# Allegro board PMOD2BNC_V1_0.brd
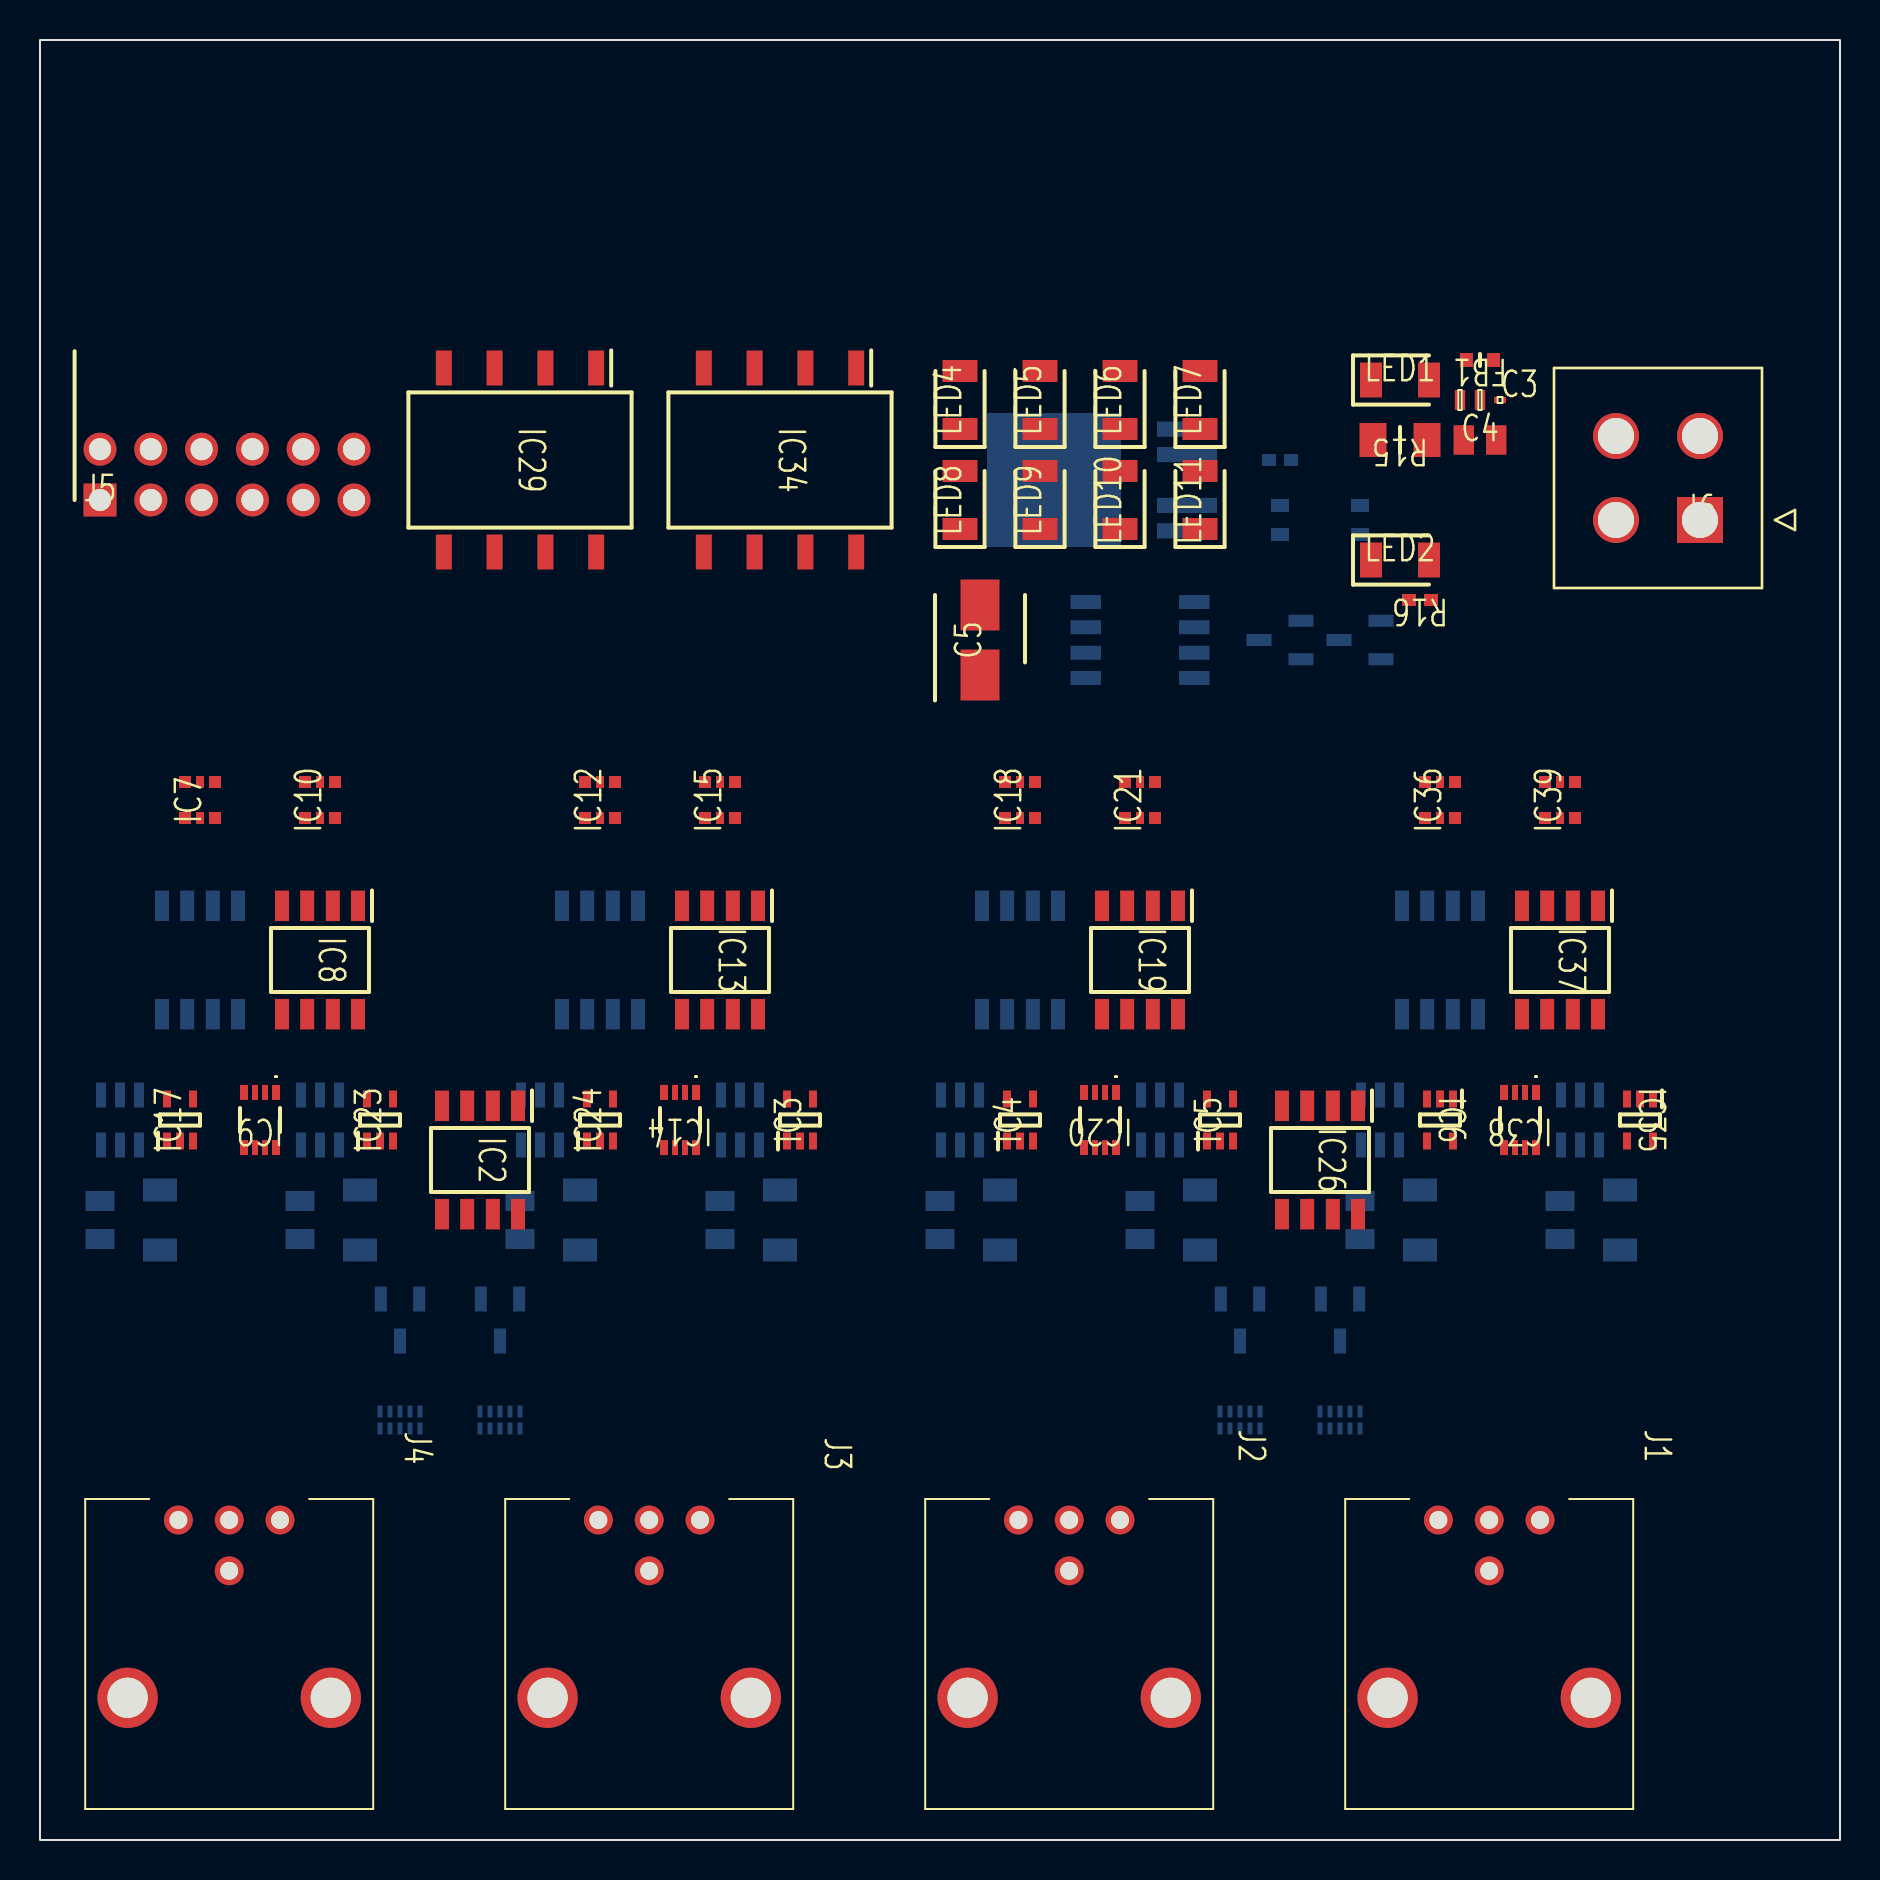
[diagram p0: board, top side]
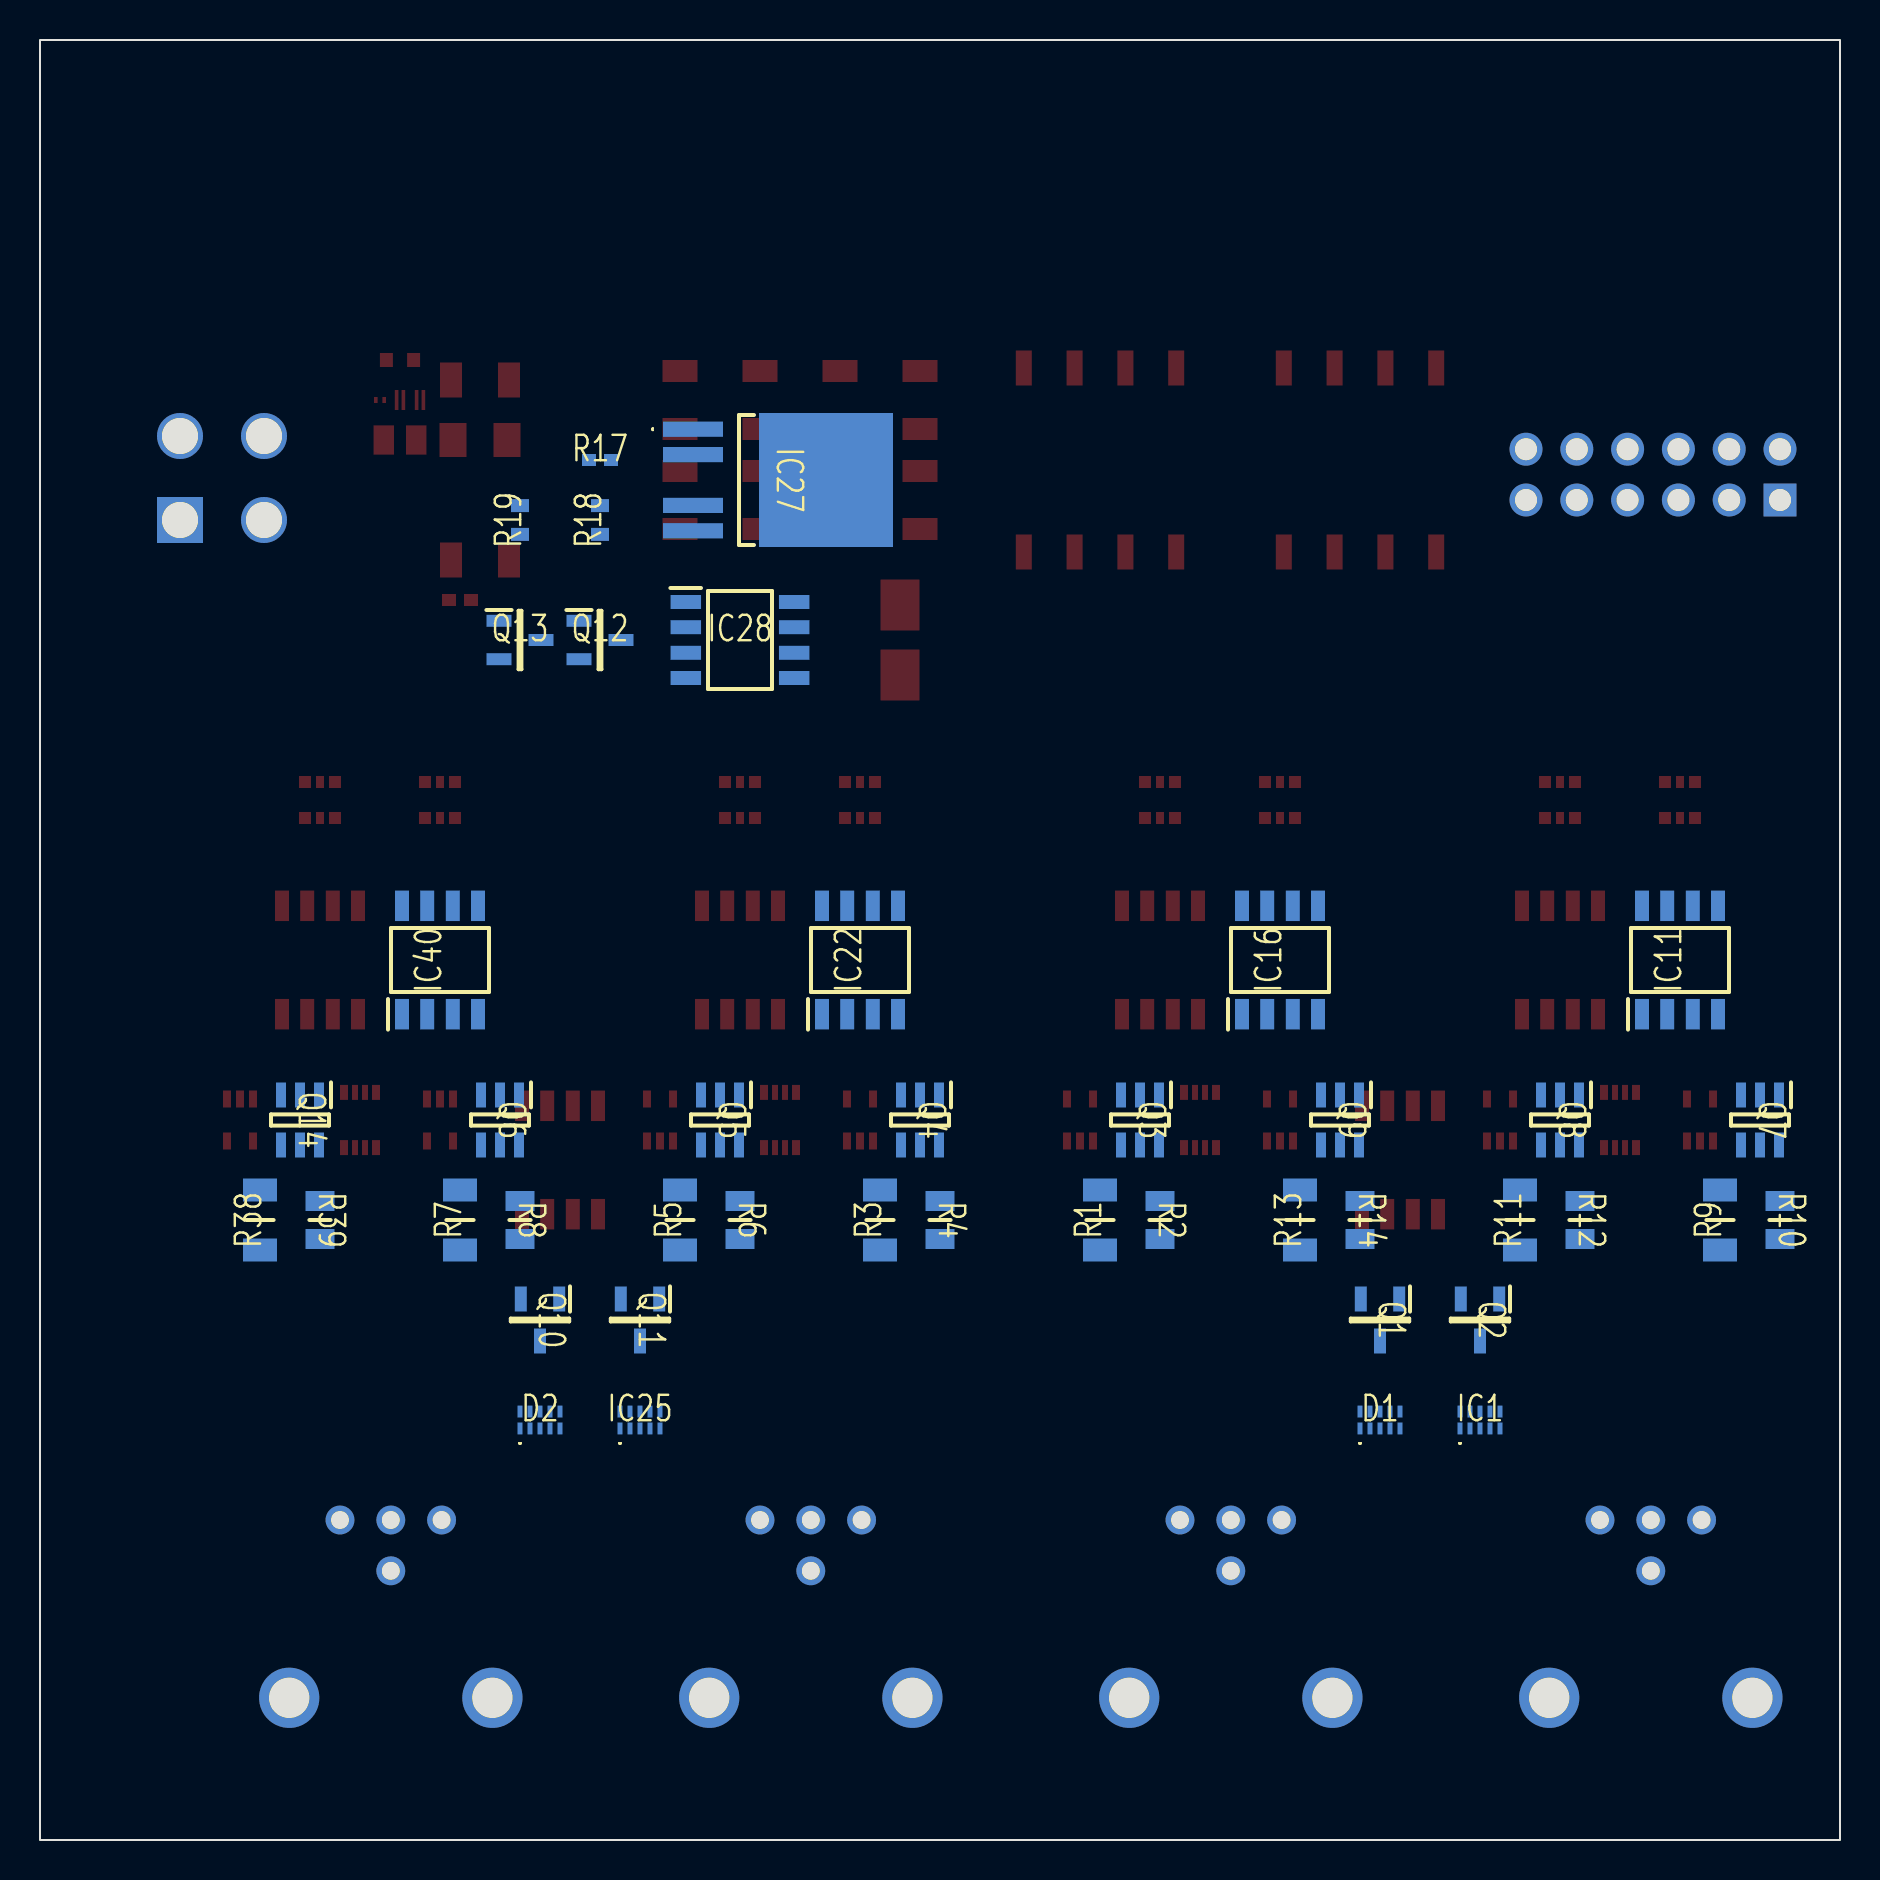
[diagram p1: board, bottom side, seen from below]

Outline 90 x 90 mm; copper layers: TOP, GND, VCC, BOTTOM. Coordinates in mm from the lower left corner of the outline.
Outline path: rectangle 0,0 90,90

## Placement (name value [footprint] x y rotation side)
C1  MSRLJ103SB5104MFNA01_100n  [MSRLJ103SB5104MFNA01_100N]  71 72 0 top
C2  MAASL063SB7103MFCA01  [100NCAP]  72 72 0 top
C3  KAM03CT70J105KH_1u  [KAM03CT70J105KH_1U]  73 72 0 top
C4  08053D334KAT2A  [CAPC2012X140N]  72 70 0 top
C5  MAL215375109E3  [CAPAE450X450N]  47 60 90 top
D1  PESD4USB3B_TBSX  [PESD4USB3BTBSX]  23 21 180 bottom
D2  PESD4USB3B_TBSX  [PESD4USB3BTBSX]  65 21 180 bottom
FB1  BLM18PG121SN1D  [BLM18EG121SH1D]  72 74 180 top
IC1  PESD4USB5B_TBRX  [PESD4USB5BTBRX]  18 21 180 bottom
IC2  FDS8958B  [SOIC127P600X175-8N]  22 34 270 top
IC3  NLVHC1G14DFT1G  [SOT65P210X110-5N]  38 36 90 top
IC4  NLVHC1G14DFT1G  [SOT65P210X110-5N]  49 36 90 top
IC5  NLVHC1G14DFT1G  [SOT65P210X110-5N]  59 36 90 top
IC6  NLVHC1G14DFT1G  [SOT65P210X110-5N]  70 36 270 top
IC7  74LVC1G3157GW_125  [74LVC1G3157GW125]  8 52 90 top
IC8  SI8620BC_B_IS  [SOIC127P600X175-8N]  14 44 270 top
IC9  74LVCH2T45DC_Q100H  [74LVCH2T45DCQ100H]  11 36 180 top
IC10  74LVC1G3157GW_125  [74LVC1G3157GW125]  14 52 90 top
IC11  SI8620BC_B_IS  [SOIC127P600X175-8N]  8 44 90 bottom
IC12  74LVC1G3157GW_125  [74LVC1G3157GW125]  28 52 90 top
IC13  SI8620BC_B_IS  [SOIC127P600X175-8N]  34 44 270 top
IC14  74LVCH2T45DC_Q100H  [74LVCH2T45DCQ100H]  32 36 180 top
IC15  74LVC1G3157GW_125  [74LVC1G3157GW125]  34 52 90 top
IC16  SI8620BC_B_IS  [SOIC127P600X175-8N]  28 44 90 bottom
IC17  NLVHC1G14DFT1G  [SOT65P210X110-5N]  7 36 90 top
IC18  74LVC1G3157GW_125  [74LVC1G3157GW125]  49 52 90 top
IC19  SI8620BC_B_IS  [SOIC127P600X175-8N]  55 44 270 top
IC20  74LVCH2T45DC_Q100H  [74LVCH2T45DCQ100H]  53 36 180 top
IC21  74LVC1G3157GW_125  [74LVC1G3157GW125]  55 52 90 top
IC22  SI8620BC_B_IS  [SOIC127P600X175-8N]  49 44 90 bottom
IC23  NLVHC1G14DFT1G  [SOT65P210X110-5N]  17 36 90 top
IC24  NLVHC1G14DFT1G  [SOT65P210X110-5N]  28 36 90 top
IC25  PESD4USB5B_TBRX  [PESD4USB5BTBRX]  60 21 180 bottom
IC26  FDS8958B  [SOIC127P600X175-8N]  64 34 270 top
IC27  -  [LD29150PTR]  52 68 270 bottom
IC28  FDS8958B  [SOIC127P600X175-8N]  55 60 180 bottom
IC29  DS04_254_2_04BK_SMT  [SOP254P990X430-8N]  24 69 270 top
IC34  DS04_254_2_04BK_SMT  [SOP254P990X430-8N]  37 69 270 top
IC35  NLVHC1G14DFT1G  [SOT65P210X110-5N]  80 36 270 top
IC36  74LVC1G3157GW_125  [74LVC1G3157GW125]  70 52 90 top
IC37  SI8620BC_B_IS  [SOIC127P600X175-8N]  76 44 270 top
IC38  74LVCH2T45DC_Q100H  [74LVCH2T45DCQ100H]  74 36 180 top
IC39  74LVC1G3157GW_125  [74LVC1G3157GW125]  76 52 90 top
IC40  SI8620BC_B_IS  [SOIC127P600X175-8N]  70 44 90 bottom
J1  031_6576  [0316576]  75 16 270 top
J2  031_6576  [0316576]  54 16 270 top
J3  031_6576  [0316576]  33 16 270 top
J4  031_6576  [0316576]  12 16 270 top
J5  71764_0114  [717640112]  3 67 0 top
J6  46207_1104  [46207-YY_2_04]  83 66 0 top
LED1  5988260107F  [LEDC3216X78N]  68 73 0 top
LED2  5988260107F  [LEDC3216X78N]  68 64 0 top
LED4  5988260107F  [LEDC3216X78N]  46 72 90 top
LED5  5988260107F  [LEDC3216X78N]  50 72 90 top
LED6  5988260107F  [LEDC3216X78N]  54 72 90 top
LED7  5988260107F  [LEDC3216X78N]  58 72 90 top
LED8  5988260107F  [LEDC3216X78N]  46 67 90 top
LED9  5988260107F  [LEDC3216X78N]  50 67 90 top
LED10  5988260107F  [LEDC3216X78N]  54 67 90 top
LED11  5988260107F  [LEDC3216X78N]  58 67 90 top
Q1  NVR4501NT1G  [SOT96P237X111-3N]  23 26 270 bottom
Q2  NVR4501NT1G  [SOT96P237X111-3N]  18 26 270 bottom
Q3  NTGD4167CT1G  [SOT95P275X110-6N]  35 36 270 bottom
Q4  NTGD4167CT1G  [SOT95P275X110-6N]  46 36 270 bottom
Q5  NTGD4167CT1G  [SOT95P275X110-6N]  56 36 270 bottom
Q6  NTGD4167CT1G  [SOT95P275X110-6N]  67 36 270 bottom
Q7  NTGD4167CT1G  [SOT95P275X110-6N]  4 36 270 bottom
Q8  NTGD4167CT1G  [SOT95P275X110-6N]  14 36 270 bottom
Q9  NTGD4167CT1G  [SOT95P275X110-6N]  25 36 270 bottom
Q10  NVR4501NT1G  [SOT96P237X111-3N]  65 26 270 bottom
Q11  NVR4501NT1G  [SOT96P237X111-3N]  60 26 270 bottom
Q12  NVR4501NT1G  [SOT96P237X111-3N]  62 60 180 bottom
Q13  NVR4501NT1G  [SOT96P237X111-3N]  66 60 180 bottom
Q14  NTGD4167CT1G  [SOT95P275X110-6N]  77 36 270 bottom
R1  ERA_8AEB1580V  [RESC3216X70N]  37 31 90 bottom
R2  RP73PF2A73R2BTDF  [RESC2012X65N]  34 31 270 bottom
R3  ERA_8AEB1580V  [RESC3216X70N]  48 31 90 bottom
R4  RP73PF2A73R2BTDF  [RESC2012X65N]  45 31 270 bottom
R5  ERA_8AEB1580V  [RESC3216X70N]  58 31 90 bottom
R6  RP73PF2A73R2BTDF  [RESC2012X65N]  55 31 270 bottom
R7  ERA_8AEB1580V  [RESC3216X70N]  69 31 90 bottom
R8  RP73PF2A73R2BTDF  [RESC2012X65N]  66 31 270 bottom
R9  ERA_8AEB1580V  [RESC3216X70N]  6 31 90 bottom
R10  RP73PF2A73R2BTDF  [RESC2012X65N]  3 31 270 bottom
R11  ERA_8AEB1580V  [RESC3216X70N]  16 31 90 bottom
R12  RP73PF2A73R2BTDF  [RESC2012X65N]  13 31 270 bottom
R13  ERA_8AEB1580V  [RESC3216X70N]  27 31 90 bottom
R14  RP73PF2A73R2BTDF  [RESC2012X65N]  24 31 270 bottom
R15  RNCP1206FTD10K0  [RESC3115X60N]  68 70 180 top
R16  TNPU04021K00BZEP00  [RESC1005X40N]  69 62 180 top
R17  TNPU04021K00BZEP00  [RESC1005X40N]  62 69 180 bottom
R18  ERA_3VEB5900V  [ERA3KV__0603_]  62 66 90 bottom
R19  ERA_3VEB3240V  [ERA3KV__0603_]  66 66 90 bottom
R38  ERA_8AEB1580V  [RESC3216X70N]  79 31 90 bottom
R39  RP73PF2A73R2BTDF  [RESC2012X65N]  76 31 270 bottom

## Library data of the parts
C1 = MSRLJ103SB5104MFNA01_100n
C2 = 100nCAP
C3 = KAM03CT70J105KH_1u
C4 = 08053D334KAT2A
C5 = MAL215375109E3
D1 D2 = PESD4USB3B_TBSX
FB1 = BLM18PG121SN1D
IC1 IC25 = PESD4USB5B_TBRX
IC2 IC26 IC28 = FDS8958B
IC3-IC6 IC17 IC23 IC24 IC35 = NLVHC1G14DFT1G
IC7 IC10 IC12 IC15 IC18 IC21 IC36 IC39 = 74LVC1G3157GW_125
IC8 IC11 IC13 IC16 IC19 IC22 IC37 IC40 = SI8620BC_B_IS
IC9 IC14 IC20 IC38 = 74LVCH2T45DC_Q100H
IC27 = LD29150PTR
IC29 IC34 = DS04_254_2_04BK_SMT
J1-J4 = 031_6576
J5 = 71764_0114
J6 = 46207_1104
LED1 LED2 LED4-LED11 = 5988260107F
Q1 Q2 Q10-Q13 = NVR4501NT1G
Q3-Q9 Q14 = NTGD4167CT1G
R1 R3 R5 R7 R9 R11 R13 R38 = ERA_8AEB1580V
R2 R4 R6 R8 R10 R12 R14 R39 = RP73PF2A73R2BTDF
R15 = RNCP1206FTD10K0
R16 R17 = TNPU04021K00BZEP00
R18 = ERA_3VEB5900V
R19 = ERA_3VEB3240V

## Footprints (pads in the part's own frame, mm; a bottom-side part is the same pattern mirrored in y, then rotated)
74LVC1G3157GW125
  rect 0.6x0.6 smd: 1(-0.9,0.75) 3(-0.9,-0.75) 4(0.9,-0.75) 6(0.9,0.75)
  rect 0.6x0.4 smd: 2(-0.9,0) 5(0.9,0)
74LVCH2T45DCQ100H
  rect 0.4x0.75 smd: 1(-0.8,-1.38) 4(0.8,-1.38) 5(0.8,1.38) 8(-0.8,1.38)
  rect 0.3x0.75 smd: 2(-0.25,-1.38) 3(0.25,-1.38) 6(0.25,1.38) 7(-0.25,1.38)
100NCAP
  rect 0.18x1 smd: 1(-0.17,0) 2(0.17,0)
46207-YY_2_04
  rect 2.3x2.3 hole 1.8: 1(0,0)
  round 2.3 hole 1.8: 2(-4.2,0) 3(0,4.2) 4(-4.2,4.2)
0316576
  round 1.446 hole 0.89: 1(0,0) 2(0,-2.54) 3(0,-5.08) 4(2.54,-2.54)
  round 3.015 hole 2.01: MH1(8.89,-7.62) MH2(8.89,2.54)
717640112
  rect 1.65x1.65 hole 1.1: 1(0,0)
  round 1.65 hole 1.1: 2(0,2.54) 3(2.54,0) 4(2.54,2.54) 5(5.08,0) 6(5.08,2.54) 7(7.62,0) 8(7.62,2.54) 9(10.16,0) 10(10.16,2.54) 11(12.7,0) 12(12.7,2.54)
BLM18EG121SH1D
  rect 0.65x0.7 smd: 1(-0.68,0) 2(0.68,0)
CAPAE450X450N
  rect 2.55x1.95 smd: 1(-1.75,0) 2(1.75,0)
CAPC2012X140N
  rect 1.02x1.47 smd: 1(-0.81,0) 2(0.81,0)
ERA3KV__0603_
  rect 0.65x0.9 smd: 1(-0.72,0) 2(0.72,0)
KAM03CT70J105KH_1U
  rect 0.18x0.3 smd: 1(-0.21,0) 2(0.21,0)
LD29150PTR
  rect 0.76x3 smd: 1(-2.54,-5.35) 2(-1.27,-5.35) 3(1.27,-5.35) 4(2.54,-5.35)
  rect 6.7x6.7 smd: 5(0,1.3)
LEDC3216X78N
  rect 1.1x1.75 smd: 1(-1.45,0) 2(1.45,0)
MSRLJ103SB5104MFNA01_100N
  rect 0.18x1 smd: 1(-0.17,0) 2(0.17,0)
PESD4USB3BTBSX
  rect 0.25x0.6 smd: 1(-1,-0.42) 2(-0.5,-0.42) 3(0,-0.42) 4(0.5,-0.42) 5(1,-0.42) 6(1,0.42) 7(0.5,0.42) 8(0,0.42) 9(-0.5,0.42) 10(-1,0.42)
PESD4USB5BTBRX
  rect 0.25x0.6 smd: 1(-1,-0.42) 2(-0.5,-0.42) 3(0,-0.42) 4(0.5,-0.42) 5(1,-0.42) 6(1,0.42) 7(0.5,0.42) 8(0,0.42) 9(-0.5,0.42) 10(-1,0.42)
RESC1005X40N
  rect 0.7x0.6 smd: 1(-0.55,0) 2(0.55,0)
RESC2012X65N
  rect 1x1.45 smd: 1(-0.95,0) 2(0.95,0)
RESC3115X60N
  rect 1.35x1.7 smd: 1(-1.35,0) 2(1.35,0)
RESC3216X70N
  rect 1.15x1.7 smd: 1(-1.5,0) 2(1.5,0)
SOIC127P600X175-8N
  rect 1.525x0.7 smd: 1(-2.71,1.9) 2(-2.71,0.64) 3(-2.71,-0.64) 4(-2.71,-1.9) 5(2.71,-1.9) 6(2.71,-0.64) 7(2.71,0.64) 8(2.71,1.9)
SOP254P990X430-8N
  rect 1.75x0.8 smd: 1(-4.6,3.81) 2(-4.6,1.27) 3(-4.6,-1.27) 4(-4.6,-3.81) 5(4.6,-3.81) 6(4.6,-1.27) 7(4.6,1.27) 8(4.6,3.81)
SOT65P210X110-5N
  rect 0.85x0.4 smd: 1(-1.05,0.65) 2(-1.05,0) 3(-1.05,-0.65) 4(1.05,-0.65) 5(1.05,0.65)
SOT95P275X110-6N
  rect 1.25x0.5 smd: 1(-1.25,0.95) 2(-1.25,0) 3(-1.25,-0.95) 4(1.25,-0.95) 5(1.25,0) 6(1.25,0.95)
SOT96P237X111-3N
  rect 1.25x0.6 smd: 1(-1.05,0.96) 2(-1.05,-0.96) 3(1.05,0)

## Nets
3V3_FPGA: IC7.5(VCC) IC8.1(VDD1) IC10.5(VCC) IC11.8(VDD2) IC12.5(VCC) IC13.1(VDD1) IC15.5(VCC) IC16.8(VDD2) IC18.5(VCC) IC19.1(VDD1) IC21.5(VCC) IC22.8(VDD2) IC29.1(COM_1) IC29.2(COM_2) IC29.3(COM_3) IC29.4(COM_4) IC36.5(VCC) IC37.1(VDD1) IC39.5(VCC) IC40.8(VDD2) J5.3 J5.4
12V0: C1.2 C2.2 C3.2 C4.2 FB1.2 IC2.3(S2) IC26.3(S2) IC27.1(INH) IC27.2(INPUT) IC28.3(S2) LED1.2(A)
GND_FPGA: IC7.2(GND) IC8.4(GND1) IC10.2(GND) IC11.5(GND2) IC12.2(GND) IC13.4(GND1) IC15.2(GND) IC16.5(GND2) IC18.2(GND) IC19.4(GND1) IC21.2(GND) IC22.5(GND2) IC36.2(GND) IC37.4(GND1) IC39.2(GND) IC40.5(GND2) J5.1 J5.2
GND_PWR: C1.1 C2.1 C3.1 C4.1 C5.2(M) IC2.1(S1) IC3.3(GND) IC4.3(GND) IC5.3(GND) IC6.3(GND) IC8.5(GND2) IC9.4(GND) IC11.4(GND1) IC13.5(GND2) IC14.4(GND) IC16.4(GND1) IC17.3(GND) IC19.5(GND2) IC20.4(GND) IC22.4(GND1) IC23.3(GND) IC24.3(GND) IC26.1(S1) IC27.5(GND) IC28.1(S1) IC35.3(GND) IC37.5(GND2) IC38.4(GND) IC40.4(GND1) J1.1 J1.3 J2.1 J2.3 J3.1 J3.3 J4.1 J4.3 J6.1 J6.2 Q1.2(S) Q2.2(S) Q3.5(S1) Q4.5(S1) Q5.5(S1) Q6.5(S1) Q7.5(S1) Q8.5(S1) Q9.5(S1) Q10.2(S) Q11.2(S) Q12.2(S) Q13.2(S) Q14.5(S1) R15.1 R16.1
VCC_PWR: C5.1(P) IC3.5(VCC) IC4.5(VCC) IC5.5(VCC) IC6.5(VCC) IC8.8(VDD2) IC9.1(VCC_A_) IC9.8(VCC_B_) IC11.1(VDD1) IC13.8(VDD2) IC14.1(VCC_A_) IC14.8(VCC_B_) IC16.1(VDD1) IC17.5(VCC) IC19.8(VDD2) IC20.1(VCC_A_) IC20.8(VCC_B_) IC22.1(VDD1) IC23.5(VCC) IC24.5(VCC) IC27.3(OUTPUT) IC34.1(COM_1) IC34.2(COM_2) IC34.3(COM_3) IC34.4(COM_4) IC35.5(VCC) IC37.8(VDD2) IC38.1(VCC_A_) IC38.8(VCC_B_) IC40.1(VDD1) LED2.2(A) Q3.2(S2) Q4.2(S2) Q5.2(S2) Q6.2(S2) Q7.2(S2) Q8.2(S2) Q9.2(S2) Q14.2(S2) R17.2
N03864_TRCV2: IC21.3(Y0) IC22.6(B2)
N03864_TRCV3: IC15.3(Y0) IC16.6(B2)
N03864_TRCV4: IC10.3(Y0) IC11.6(B2)
N03884_TRCV2: IC18.3(Y0) IC22.7(B1)
N03884_TRCV3: IC12.3(Y0) IC16.7(B1)
N03884_TRCV4: IC7.3(Y0) IC11.7(B1)
N03944_TRCV2: IC19.7(B1) IC20.2(1A) IC22.2(A1)
N03944_TRCV3: IC13.7(B1) IC14.2(1A) IC16.2(A1)
N03944_TRCV4: IC8.7(B1) IC9.2(1A) IC11.2(A1)
N03988_TRCV2: IC19.6(B2) IC20.3(2A) IC22.3(A2)
N03988_TRCV3: IC13.6(B2) IC14.3(2A) IC16.3(A2)
N03988_TRCV4: IC8.6(B2) IC9.3(2A) IC11.3(A2)
N04114_TR3: IC5.4(Y) Q5.3(G2)
N04114_TR4: IC4.4(Y) Q4.3(G2)
N04114_TR5: IC3.4(Y) Q3.3(G2)
N04114_TR7: IC23.4(Y) Q8.3(G2)
N04114_TR8: IC17.4(Y) Q7.3(G2)
N04142_TR3: Q5.4(D2) R5.2
N04142_TR4: Q4.4(D2) R3.2
N04142_TR5: Q3.4(D2) R1.2
N04142_TR7: Q8.4(D2) R11.2
N04142_TR8: Q7.4(D2) R9.2
N04158_TRCV2: IC19.3(A2) IC21.1(Y1)
N04158_TRCV3: IC13.3(A2) IC15.1(Y1)
N04158_TRCV4: IC8.3(A2) IC10.1(Y1)
N04162_TR3: Q5.6(D1) R6.1
N04162_TR4: Q4.6(D1) R4.1
N04162_TR5: Q3.6(D1) R2.1
N04162_TR7: Q8.6(D1) R12.1
N04162_TR8: Q7.6(D1) R10.1
N04170_TRCV2: IC18.1(Y1) IC19.2(A1)
N04170_TRCV3: IC12.1(Y1) IC13.2(A1)
N04170_TRCV4: IC7.1(Y1) IC8.2(A1)
N00459: D2.3(GND_1) D2.8(GND_2) Q10.3(D)
N00484: IC25.3(GND_1) IC25.8(GND_2) Q11.3(D)
N01414: IC39.3(Y0) IC40.6(B2)
N01460: IC36.3(Y0) IC40.7(B1)
N01560: IC37.7(B1) IC38.2(1A) IC40.2(A1)
N01576: IC37.6(B2) IC38.3(2A) IC40.3(A2)
N02564: IC35.4(Y) Q14.3(G2)
N02595: Q14.4(D2) R38.2
N02615: Q14.6(D1) R39.1
N02742: FB1.1 J6.3 J6.4
N02871: IC36.4(Z) J5.11
N02889: IC18.4(Z) J5.9
N02913: IC12.4(Z) J5.7
N02946: IC7.4(Z) J5.5
N02974: IC10.4(Z) J5.6
N03044: IC29.8(NO_4) IC36.6(S) IC39.6(S)
N03056: IC18.6(S) IC21.6(S) IC29.7(NO_3)
N03071: IC12.6(S) IC15.6(S) IC29.6(NO_2)
N03083: IC7.6(S) IC10.6(S) IC29.5(NO_1)
N03095: IC38.5(DIR) LED7.2(A)
N03107: IC20.5(DIR) LED6.2(A)
N03119: IC14.5(DIR) LED5.2(A)
N03131: IC9.5(DIR) LED4.2(A)
N03320: IC37.3(A2) IC39.1(Y1)
N03332: IC36.1(Y1) IC37.2(A1)
N03351: D2.1(CH1) IC25.1(CH1) IC38.7(1B) J1.2 R38.1 R39.2
N03369: D2.2(CH2) IC25.2(CH2) IC38.6(2B) J1.4 R7.1 R8.2
N03381: D2.4(CH3) IC20.7(1B) IC25.4(CH3) J2.2 R5.1 R6.2
N03410: D2.5(CH4) IC20.6(2B) IC25.5(CH4) J2.4 R3.1 R4.2
N03422: D1.1(CH1) IC1.1(CH1) IC14.7(1B) J3.2 R1.1 R2.2
N03434: D1.2(CH2) IC1.2(CH2) IC14.6(2B) J3.4 R13.1 R14.2
N03446: D1.4(CH3) IC1.4(CH3) IC9.7(1B) J4.2 R11.1 R12.2
N03458: D1.5(CH4) IC1.5(CH4) IC9.6(2B) J4.4 R9.1 R10.2
N03470: IC6.2(A) IC34.8(NO_4) IC35.2(A) LED9.2(A) Q6.1(G1) Q14.1(G1)
N03492: IC4.2(A) IC5.2(A) IC34.7(NO_3) LED11.2(A) Q4.1(G1) Q5.1(G1)
N03514: IC3.2(A) IC24.2(A) IC34.6(NO_2) LED10.2(A) Q3.1(G1) Q9.1(G1)
N03538: IC17.2(A) IC23.2(A) IC34.5(NO_1) LED8.2(A) Q7.1(G1) Q8.1(G1)
N03748: IC2.2(G1) IC2.4(G2) IC26.2(G1) IC26.4(G2) IC28.2(G1) IC28.4(G2) Q2.1(G) Q11.1(G) Q13.1(G)
N04132: IC6.4(Y) Q6.3(G2)
N04160: Q6.4(D2) R7.2
N04180: Q6.6(D1) R8.1
N04349: IC24.4(Y) Q9.3(G2)
N04377: Q9.4(D2) R13.2
N04397: Q9.6(D1) R14.1
N04832: IC27.4(ADJ) R17.1 R18.2 R19.2
N05449: IC28.5(D2_1) IC28.6(D2_2) IC28.7(D1_1) IC28.8(D1_2) Q12.1(G)
N05863: IC26.5(D2_1) IC26.6(D2_2) IC26.7(D1_1) IC26.8(D1_2) Q10.1(G)
N05866: LED1.1(K) R15.2
N05972: LED2.1(K) R16.2
N06487: D1.3(GND_1) D1.8(GND_2) Q1.3(D)
N06507: IC1.3(GND_1) IC1.8(GND_2) Q2.3(D)
N06731: IC2.5(D2_1) IC2.6(D2_2) IC2.7(D1_1) IC2.8(D1_2) Q1.1(G)
N09508: LED8.1(K)
N09512: LED10.1(K)
N09516: LED11.1(K)
N09520: LED9.1(K)
N10946: LED4.1(K)
N10950: LED5.1(K)
N10954: LED6.1(K)
N10958: LED7.1(K)
N12525: IC39.4(Z) J5.12
N12551: IC21.4(Z) J5.10
N12586: IC15.4(Z) J5.8
N045052: Q12.3(D) R18.1
N045232: Q13.3(D) R19.1

Pads without a net: D1 6 7 9 10; D2 6 7 9 10; IC1 6 7 9 10; IC3 1; IC4 1; IC5 1; IC6 1; IC17 1; IC23 1; IC24 1; IC25 6 7 9 10; IC35 1; J1 MH1 MH2; J2 MH1 MH2; J3 MH1 MH2; J4 MH1 MH2
